# Altium PCB mainPCB.PcbDoc
Units mm, origin at the board's own origin, x right, y up, seen from the top; angles counter-clockwise.
Board outline 65 x 32.8 mm, 2 copper layers (Top Layer, Bottom Layer); 68 components, 58 nets, 349 pads, 175 vias.
Unrouted connection lines stored in the file: 1.
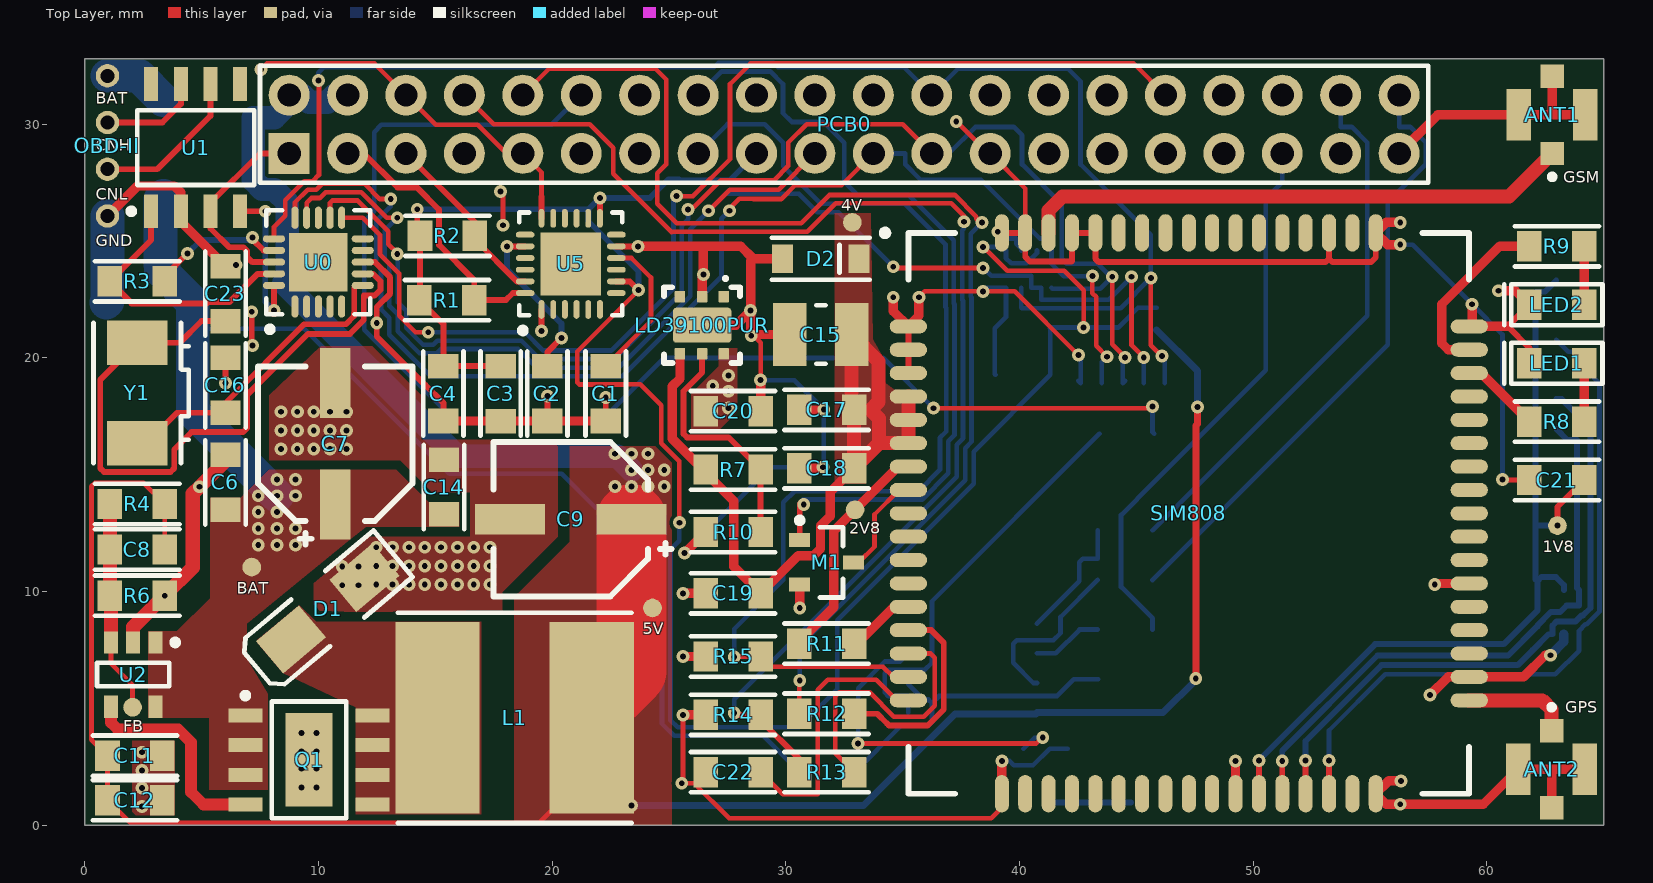
[diagram p0: Top Layer view]
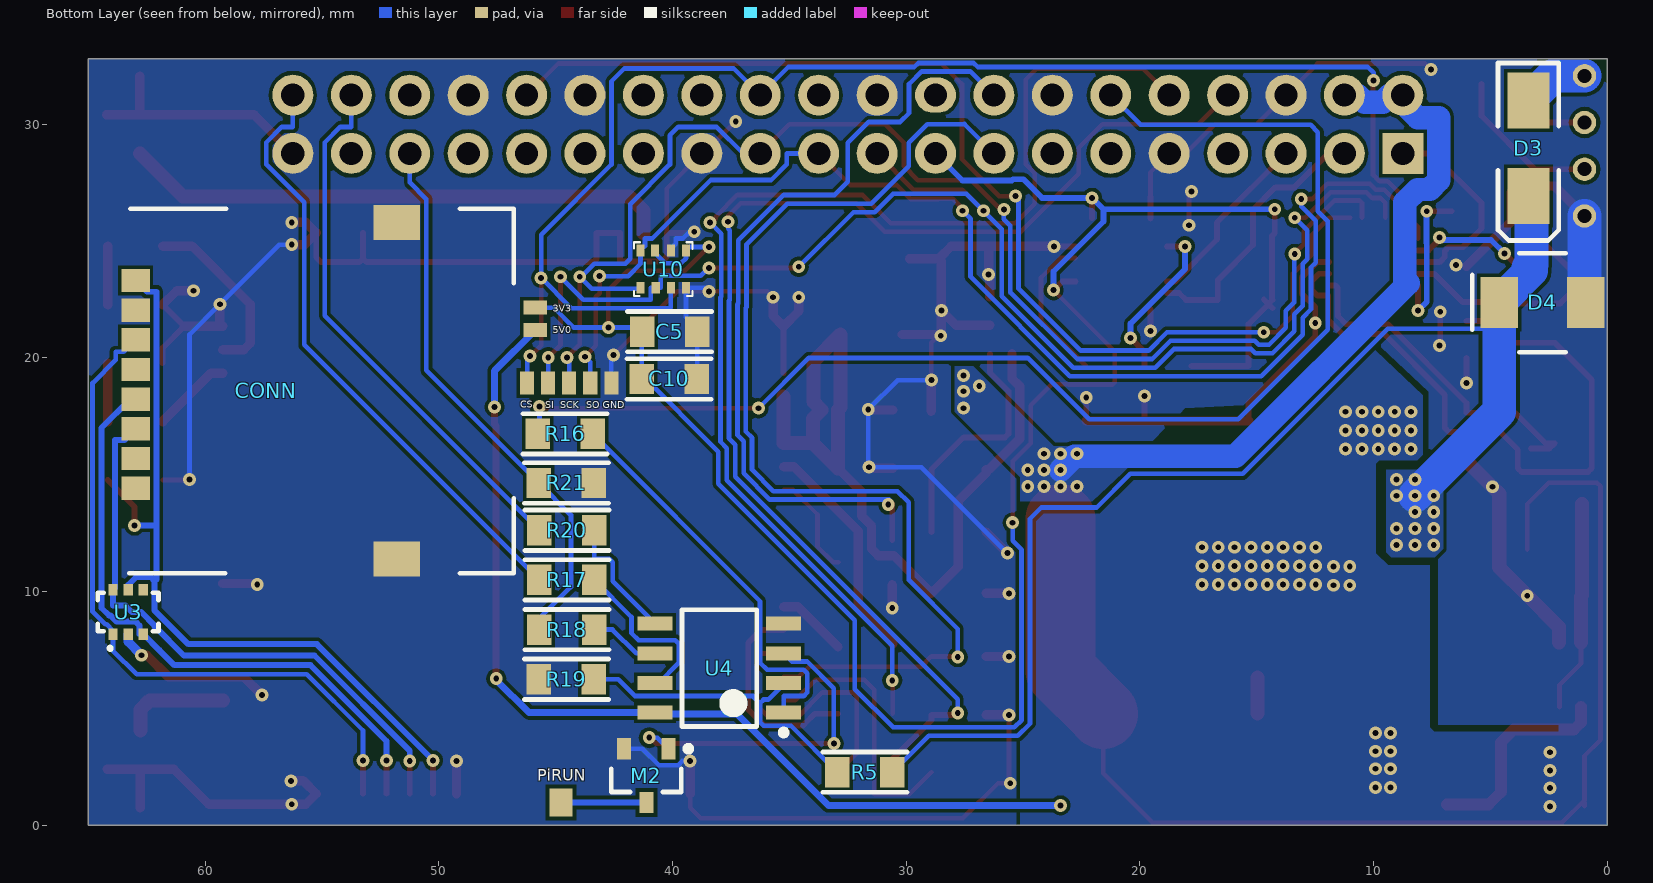
[diagram p1: Bottom Layer view, seen from below]

## Layer stack, top to bottom
Top Solder: solder mask 0.0102, Solder Resist, Dk 3.5
Top Layer: signal copper 0.0356
Dielectric 1: dielectric 0.32, FR-4, Dk 4.8
Bottom Layer: signal copper 0.0356
Bottom Solder: solder mask 0.0102, Solder Resist, Dk 3.5

## Board outline
0.125,0 0,0 0,32.8 65,32.8 65,0

## Design rules (kind name [scope] priority, off if disabled: settings)
Clearance [All] p1: gap=0.16
HoleSize [All] p1: absolutevalues=TRUE maxlimit=6.3 minlimit=0.2 maxpercent=80.000 minpercent=20.000
MinimumAnnularRing [All] p1: minimumring=0.15
PolygonConnect [All] p1: connectstyle=Direct reliefconductorwidth=0.254 reliefentries=4 polygonreliefangle="90 Angle" airgapwidth=0.254
RoutingVias [All] p1: holewidth=0.2 width=0.5 viastyle="Through Hole" minholewidth=0.2 minwidth=0.5 maxholewidth=10 maxwidth=10
SolderMaskExpansion [All] p1: expansion=0.102
Width [All] p1: maxlimit=12 minlimit=0.16 preferedwidth=0.2
29 further rules are at their usual default settings.

## Classes and differential pairs
component class SIM808: ANT1 ANT2 C15 C17 C18 C19 C20 C21 C22 CONN D2 LD39100PUR LED1 LED2 M1 R7 R8 R9 R10 R11 R12 R13 R14 R15 SIM808 U3
component class PowerCircuit: C6 C7 C8 C9 C11 C12 C14 D1 L1 Q1 R4 R6 U2
component class MPU6050: C1 C2 C3 C4 R1 R2 U5
component class CanNode: C16 C23 D3 D4 OBD-II PCB0 R3 U0 U1 Y1
component class ATtiny: M2 R5 R16 R17 R18 R19 R20 R21 U4
component class bmp280_i2c: C5 C10 U10

## Components (designator, comment, footprint, x,y, rotation, side; value= is the part's Value field where it differs from the comment)
ANT1 "antenna" uFL 60.8,29.25 r0 top
ANT2 "antenna" uFL 64.775,3.55 r180 top
C1 "Generic Capacitor" 0805 22.275,18.475 r90 top
C2 "Generic Capacitor" 0805 19.775,18.475 r90 top
C3 "Generic Capacitor" 0805 17.825,18.475 r270 top
C4 "Generic Capacitor" 0805 15.325,18.475 r90 top
C5 "Generic Capacitor" 0805 40.125,21.15 r180 bottom
C6 "Generic Capacitor" 0805 6.05,14.675 r270 top
C7 "47uF, 25V" "Cap 6.3mm dia 5.4mm Height" 10.725,16.325 r180 top
C8 "Generic Capacitor" 0805 2.25,11.775 r180 top
C9 "33uF, 16V" "Cap 6.3mm dia 5.4mm Height" 20.8,13.1 r270 top
C10 "Generic Capacitor" 0805 40.15,19.125 r180 bottom
C11 "Generic Capacitor" 0805 2.15,3 r0 top
C12 "Generic Capacitor" 0805 2.15,1.1 r0 top
C14 "Generic Capacitor" 0805 15.35,14.475 r90 top
C15 "Cap Cer 100uF" "Cap 1210" 31.5,21 r180 top
C16 "Generic Capacitor" 0805 6,18.825 r90 top
C17 "Generic Capacitor" 0805 31.75,17.75 r180 top
C18 "Generic Capacitor" 0805 31.75,15.25 r180 top
C19 "Generic Capacitor" 0805 27.75,9.95 r0 top
C20 "Generic Capacitor" 0805 27.75,17.75 r0 top
C21 "Generic Capacitor" 0805 63,14.75 r180 top
C22 "Generic Capacitor" 0805 27.75,2.25 r180 top
C23 "Generic Capacitor" 0805 6,22.75 r90 top
CONN "CONN SMART CARD" "CONN SMART CARD" 55.1,18.59 r270 bottom
D1 "RSX301L-30TE25" SMA_diode 10.4,9.275 r220 top
D2 "Diode Zener" "Diode Zener" 31.5,24.25 r0 top
D3 "RSX301L-30TE25" SMA_diode 3.375,28.975 r270 bottom
D4 "TVS Diode" "TVS Diode 15" 2.775,22.375 r0 bottom
L1 "15uH" SRN8040 18.4,4.6 r0 top
LD39100PUR "LD39100PUR" LD39100PUR 26.425,21.4 r180 top
LED1 "Led Red" "0805 LED" 63,19.75 r180 top
LED2 "Led Green" "0805 LED" 63,22.25 r180 top
M1 "N-CH Mosfet Switch" SOT32-3 31.75,11.25 r0 top
M2 "N-CH Mosfet Switch" SOT32-3 41.125,2.125 r270 bottom
OBD-II "OBD-II" OBD_II 0.975,29.075 r0 top
PCB0 "Rasberry Pi footprint" "Rasberry PI" 32.5,30 r0 top
Q1 "DMP3037LSS" SOIC-8-PP 9.6,2.795 r0 top
R1 "Resistor" 0805 15.5,22.45 r180 top
R2 "Resistor" 0805 15.525,25.2 r180 top
R3 "Resistor" 0805 2.25,23.25 r180 top
R4 "Resistor" 0805 2.25,13.775 r0 top
R5 "Resistor" 0805 31.775,2.3 r180 bottom
R6 "Resistor" 0805 2.25,9.8 r180 top
R7 "Resistor" 0805 27.75,15.25 r0 top
R8 "Resistor" 0805 63,17.25 r180 top
R9 "Resistor" 0805 63,24.75 r180 top
R10 "Resistor" 0805 27.75,12.575 r0 top
R11 "Resistor" 0805 31.75,7.75 r180 top
R12 "Resistor" 0805 31.75,4.75 r180 top
R13 "Resistor" 0805 31.75,2.25 r180 top
R14 "Resistor" 0805 27.75,4.75 r0 top
R15 "Resistor" 0805 27.75,7.25 r0 top
R16 "Resistor" 0805 44.6,16.775 r180 bottom
R17 "Resistor" 0805 44.525,10.525 r180 bottom
R18 "Resistor" 0805 44.525,8.4 r180 bottom
R19 "Resistor" 0805 44.55,6.275 r180 bottom
R20 "Resistor" 0805 44.525,12.65 r180 bottom
R21 "Resistor" 0805 44.55,14.675 r180 bottom
SIM808 "SIM808" SIM808 47.25,13.35 r0 top
U0 "MCP2515" MCP2515 10,24.1 r90 top
U1 "TCAN332" SOIC-8 4.75,29 r90 top
U2 "IXD3221" SOT23-5 2.075,6.45 r270 top
U3 "TVS Diode" SMF05CT2G 63.3,9.125 r90 bottom
U4 "ATtiny13A" ATtiny13A 38,6.725 r0 bottom
U5 "MPU6050" MPU-6050 20.8,24.025 r90 top
U10 "BMP280" bmp280_i2c 41.65,24.8 r270 bottom
Y1 "XTAL" XTAL-16.000 2.25,18.5 r270 top

## Footprints (in the part's own frame and the unit in brackets; to place one, negate y for a bottom-side part, rotate by r counter-clockwise, add the part's x,y. Pads: shape width x height; smd on the part's side, far side on the other; paste and mask are expansions set on the pad)
0805 [mm] "0805 SMD"
  rect 1.05x1.3 smd: 1(-1.174,-0.025) 2(1.175,-0.025)
  silkscreen extent -1.8,-0.89 1.8,0.84, body extent -1.45,-0.68 1.47,0.63, height 0.64
"0805 LED" [mm] "0805 SMD LED"
  rect 1.05x1.3 smd: 1(1.175,-0.025) 2(-1.174,-0.025)
  silkscreen extent -1.95,-0.9 2.25,0.85, body extent -1.45,-0.68 1.47,0.63, height 0.64
ATtiny13A [mm]
  rect 1.5x0.6 smd: 1(-2.75,1.905) 2(-2.75,0.635) 3(-2.75,-0.635) 4(-2.75,-1.905) 5(2.75,-1.905) 6(2.75,-0.635) 7(2.75,0.635) 8(2.75,1.905)
  silkscreen extent -2.87,-2.5 1.6,2.88, body extent -3.02,-2.5 3.02,2.5, height 1.75
bmp280_i2c [mm] "pressure sensor"
  rect 0.5x0.35 smd: CSB(1.8,1.575) GND(0.2,1.575) GND(1.8,2.225) SCK(1.8,0.275) SDI(1.8,0.925) SDO(0.2,0.275) VDD(0.2,2.225) VDDIO(0.2,0.9)
  silkscreen extent -0.15,0 2.15,2.5, body extent 0,0 2.01,2.49, height 1
"Cap 6.3mm dia 5.4mm Height" [mm] "Cap 6.3mm dia 5.4mm Height"
  rect 1.3x3 smd: 1(0,2.6) 2(0,-2.6)
  silkscreen extent -3.3,-3.3 3.3,4.32, body extent -3.15,-3.15 3.15,3.15, height 5.3
"Cap 1210" [mm] "1210 (3225m)"
  rect 1.45x2.7 smd: 1(-1.325,0) 2(1.325,0)
  silkscreen extent -0.2,-1.25 0.2,1.25, body extent -1.7,-1.35 1.7,1.35, height 2.5
"CONN SMART CARD" [mm] "Micro Sim connector"
  rect 1x1.2 smd: 1(-4.725,-7.875) 2(-2.185,-7.875) 3(0.355,-7.875) 4(2.895,-7.875) 5(-3.455,-7.875) 6(-0.915,-7.875) 7(1.625,-7.875) 8(4.165,-7.875)
  rect 1.5x2 smd: *(-7.2,3.3) *(7.2,3.3)
  silkscreen extent -7.8,-8.15 7.8,8.3, body extent -7.7,-8.15 7.7,8.15, height 1.9
"Diode Zener" [mm]
  rect 0.91x1.22 smd: 1(1.637,0) 2(-1.637,0)
  silkscreen extent -2.1,-0.9 2.1,0.9, body extent -2,-0.8 2,0.8, height 1.2
LD39100PUR [mm]
  rrect20% 0.45x0.5 smd: 1(-0.925,-1.225) 2(0,-1.225) 3(0.95,-1.225) 4(0.95,1.225) 5(0,1.225) 6(-0.925,1.225)
  rrect20% 2.5x1.5 smd: 2(0,0)
  silkscreen extent -1.63,-2.02 1.63,1.62, body extent -1.5,-1.5 1.5,1.5, height 1
MCP2515 [mm] "IC CAN CTLR W/SPI 2.0B 20-QFN"
  oval 0.95x0.3 smd: 1(-1.9,1) 2(-1.9,0.5) 3(-1.9,0) 4(-1.9,-0.5) 5(-1.9,-1) 11(1.9,-1) 12(1.9,-0.5) 13(1.9,0) 14(1.9,0.5) 15(1.9,1)
  oval 0.3x0.95 smd: 6(-1,-1.9) 7(-0.5,-1.9) 8(0,-1.9) 9(0.5,-1.9) 10(1,-1.9) 16(1,1.9) 17(0.5,1.9) 18(0,1.9) 19(-0.5,1.9) 20(-1,1.9)
  rect 2.5x2.5 smd: 21(0,0)
  silkscreen extent -3,-2.23 2.23,2.22, body extent -2.12,-2.12 2.13,2.13, height 1
MPU-6050 [mm]
  oval 0.8x0.25 smd: 1(-1.95,1.25) 2(-1.95,0.75) 3(-1.95,0.25) 4(-1.95,-0.25) 5(-1.95,-0.75) 6(-1.95,-1.25) 13(1.95,-1.25) 14(1.95,-0.75) 15(1.95,-0.25) 16(1.95,0.25) 17(1.95,0.75) 18(1.95,1.25)
  oval 0.25x0.8 smd: 7(-1.25,-1.95) 8(-0.75,-1.95) 9(-0.25,-1.95) 10(0.25,-1.95) 11(0.75,-1.95) 12(1.25,-1.95) 19(1.25,1.95) 20(0.75,1.95) 21(0.25,1.95) 22(-0.25,1.95) 23(-0.75,1.95) 24(-1.25,1.95)
  rect 2.7x2.6 smd: 25(0,0)
  silkscreen extent -2.97,-2.2 2.2,2.2, body extent -2.05,-2.05 2.05,2.05, height 0.95
OBD_II [mm]
  round 1 hole 0.6: 1(0,3) 2(0,1) 3(0,-1) 4(0,-3)
"Rasberry PI" [mm] "Rasberry PI footprint"
  rect 1.75x1.75 hole 1: 1(-23.75,-1.25)
  round 1.75 hole 1: 2(-23.75,1.25) 3(-21.25,-1.25) 4(-21.25,1.25) 5(-18.75,-1.25) 6(-18.75,1.25) 7(-16.25,-1.25) 8(-16.25,1.25) 9(-13.75,-1.25) 10(-13.75,1.25) 11(-11.25,-1.25) 12(-11.25,1.25) 13(-8.75,-1.25) 14(-8.75,1.25) 15(-6.25,-1.25) 16(-6.25,1.25) 17(-3.75,-1.25) 19(-1.25,-1.25) 20(-1.25,1.25) 21(1.25,-1.25) 22(1.25,1.25) 23(3.75,-1.25) 24(3.75,1.25) 25(6.25,-1.25) 26(6.25,1.25) 27(8.75,-1.25) 28(8.75,1.25) 29(11.25,-1.25) 30(11.25,1.25) 31(13.75,-1.25) 32(13.75,1.25) 33(16.25,-1.25) 34(16.25,1.25) 35(18.75,-1.25) 36(18.75,1.25) 37(21.25,-1.25) 38(21.25,1.25) 39(23.75,-1.25) 40(23.75,1.25)
  oval 1.75x1.5 hole 1: 18(-3.75,1.25)
  silkscreen extent -25,-2.5 25,2.5
SIM808 [mm]
  oval 1.6x0.6 smd: 1(-12,8) 2(-12,7) 3(-12,6) 4(-12,5) 5(-12,4) 6(-12,3) 7(-12,2) 8(-12,1) 9(-12,0) 10(-12,-1) 11(-12,-2) 12(-12,-3) 13(-12,-4) 14(-12,-5) 15(-12,-6) 16(-12,-7) 17(-12,-8) 35(12,-8) 36(12,-7) 37(12,-6) 38(12,-5) 39(12,-4) 40(12,-3) 41(12,-2) 42(12,-1) 43(12,0) 44(12,1) 45(12,2) 46(12,3) 47(12,4) 48(12,5) 49(12,6) 50(12,7) 51(12,8)
  oval 0.6x1.6 smd: 18(-8,-12) 19(-7,-12) 20(-6,-12) 21(-5,-12) 22(-4,-12) 23(-3,-12) 24(-2,-12) 25(-1,-12) 26(0,-12) 27(1,-12) 28(2,-12) 29(3,-12) 30(4,-12) 31(5,-12) 32(6,-12) 33(7,-12) 34(8,-12) 52(8,12) 53(7,12) 54(6,12) 55(5,12) 56(4,12) 57(3,12) 58(2,12) 59(1,12) 60(0,12) 61(-1,12) 62(-2,12) 63(-3,12) 64(-4,12) 65(-5,12) 66(-6,12) 67(-7,12) 68(-8,12)
  silkscreen extent -13.14,-12 12,12.14
SMA_diode [mm] "DO-214-AC/SMA; 2 C-Bend Leads; Body 5 x 2.7 mm, inc. leads (LxW)"
  rect 2.4x1.8 smd: 1(-2.05,0) 2(2.05,0)
  silkscreen extent -3.65,-1.3 3.95,1.3
SMF05CT2G [mm] "SOT-363"
  rect 0.5x0.4 smd: 1(-0.95,0.65) 2(-0.95,0) 3(-0.95,-0.65) 4(0.95,-0.65) 5(0.95,0) 6(0.95,0.65)
  silkscreen extent -1.57,-1.3 0.83,1.3, body extent -0.72,-1.2 0.72,1.2, height 1.1
SOIC-8 [mm] "DMP3037LSS"
  rect 1.45x0.6 smd: 1(-2.725,1.905) 2(-2.725,0.635) 3(-2.725,-0.635) 4(-2.725,-1.905) 5(2.725,-1.905) 6(2.725,-0.635) 7(2.725,0.635) 8(2.725,1.905)
  silkscreen extent -2.85,-2.5 1.6,2.88, body extent -3,-2.5 3,2.5, height 1.75
SOIC-8-PP [mm] "DMP3037LSS"
  rect 1.45x0.6 smd: 1(-2.725,1.905) 2(-2.725,0.635) 3(-2.725,-0.635) 4(-2.725,-1.905) 5(2.725,-1.905) 6(2.725,-0.635) 7(2.725,0.635) 8(2.725,1.905)
  rect 2x4 smd: 9(0,0)
  silkscreen extent -2.85,-2.5 1.6,2.88, body extent -3,-2.5 3,2.5, height 1.75
SOT23-5 [mm] "SOT23, 5-Leads, Body 2.90x2.80mm, Pitch 0.95mm, IPC Medium Density"
  rect 0.95x0.6 smd: 1(-1.375,0.95) 2(-1.375,0) 3(-1.375,-0.95) 4(1.375,-0.95) 5(1.375,0.95)
  silkscreen extent -1.5,-1.55 0.5,1.93, body extent -0.9,-1.55 0.9,1.55, height 1.1
SOT32-3 [mm] "SOT23, 3-Leads, Body 2.90x2.30mm, Pitch 0.95mm, IPC Medium Density"
  rect 0.9x0.6 smd: 1(-1.15,0.95) 2(-1.15,-0.95) 3(1.15,0)
  silkscreen extent -1.27,-1.5 0.7,1.92, body extent -0.7,-1.5 0.7,1.5, height 1.1
SRN8040 [mm] "SRN8040 inductor series Bourns"
  rect 3.6x8.2 smd: 1(-3.3,0) 2(3.3,0)
  silkscreen extent -5,-4.5 5,4.5, body extent -4,-4 4,4, height 4
"TVS Diode 15" [mm]
  rect 1.6x2.18 smd: 1(-1.85,0) 2(1.85,0)
  silkscreen extent -1,-2.1 3,2.13, body extent -2.3,-1.97 2.3,1.97, height 2.4
uFL [mm]
  rect 1.05x2.2 smd: 0(0.575,1.15) 0(3.425,1.15)
  rect 1x1 smd: 0(2,2.8) 1(2,-0.5)
  silkscreen extent 1.9,-1.6 2.1,-1.4, body extent 0.7,-0.15 3.3,2.45, height 0.36
XTAL-16.000 [mm]
  rect 1.9x2.6 smd: 0(-2.15,0) 1(2.15,0)
  silkscreen extent -3,-1.87 3,2.2, body extent -3,-1.75 3,1.75, height 1.4

## Part data
ANT1 ANT2: "uFL SMT Antenna Connector"
C1 C2 C3 C4 C5 C6 C8 C10 C11 C12 C14 C16 C17 C18 C19 C20 C21 C22 C23: library part Capacitor, "Generic capacitor"
C7: library part 865080443007, "Polorised capacitor 47uF, 25V"
C9: library part 865060343003, "Polorised capacitor 33uF, 16V"
C15: library part LMK325ABJ107MM-P, "CAP CER 100UF 10V X5R 1210"
D1 D3: "DIODE SCHOTTKY 30V 3A"
D2: library part MMSZ5231BT1G, "DIODE ZENER 5.1V 500MW SOD123"
D4: library part SMBJ15D-M3/H, "TVS DIODE 15VWM 24VC DO214AA"
L1: library part SRN8040-150MCT, "INDUCTOR 15uH 2.4A 70mOHMS SMD"
LD39100PUR: "Adjustable linear voltage regulator"
LED1: library part LTST-C171EKT, "LED RED CLEAR 0805 SMD"
LED2: library part LTST-C170GKT, "LED GREEN CLEAR 0805 SMD"
M1 M2: library part BSH105,215, "MOSFET N-CH 20V 1.05A SOT23"
PCB0: library part "Rasberry Pi"
Q1: "P-CHANNEL ENHANCEMENT MODE MOSFET"
R1 R2 R3 R4 R5 R6 R7 R8 R9 R10 R11 R12 R13 R14 R15 R16 R17 R18 R19 R20 R21: "Generic Resistor"
SIM808: "SIM808 GSM + GPRS + GPS Cellular Module"
U0: "IC CAN CTLR W/SPI 2.0B 20-QFN"
U1: "IC TXRX CAN 8SOIC"
U2: "IC REG CTRLR BUCK SOT25"
U3: library part SMF05CT2G, "TVS DIODE 5VWM 12.5VC SOT363"
U5: "IMU ACCEL/GYRO 3-AXIS I2C 24QFN"
Y1: library part XTAL-16.000, "XTAL16.0000MHZ 18PF SMD"

## Free pads (board coordinates)
  rect 0.6x1 smd far side: 7(43.525,18.925) 8(45.325,18.925) 9(44.425,18.925) 10(46.225,18.925) 12(42.625,18.925)
  rect 1x0.6 smd far side: 11(45.875,22.15) 13(45.875,21.2)
  rect 1x1.2 smd far side: 14(44.775,0.975)
  round 0.8 smd: 15(24.3,9.3) 16(2.05,5.05) 17(32.85,25.8) 19(63.025,12.825) 21(32.967,13.5) 22(7.15,11.05)

## Via types
v1: diameter 0.55, hole 0.25, Top Layer to Bottom Layer, 175 vias

## Nets (pads, with @x,y where several pads share a name; then routed paths per layer and width w, separated by ;. In a path a pad name is that pad's centre, name@x,y a point inside that pad or via, vN(x,y) a via of type N, cw(c..) or ccw(c..) an arc to the next point about the centre after c; other vN are vias at no path point)
5V_FB: C8.2 pad.16 R4.1 R6.2 U2.3 | length 9.1
  Top Layer w0.2: U2.3 1.125,6.925 2.05,6 pad.16
  Top Layer w0.6: R4.1 R4.1 C8.2 R6.2 1.125,9.775 U2.3
808_PWR: M1.1 PCB0.16 | length 34.8
  Top Layer w0.25: M1.1 30.6,13.75 30.625,13.725 v1(30.775,13.725)
  Bottom Layer w0.2: PCB0.16 27.26,32.26 29.345,32.26 29.885,31.72 29.885,30.471 30.256,30.1 31.6,30.1 32.5,29.2 32.5,27.537 33.062,26.975 35.25,26.975 37.195,25.03 37.195,22.33 37.225,22.3 37.225,16.703 36.96,16.438 36.96,15.06 35.84,13.94 30.74,13.94 30.775,13.905 v1(30.775,13.725)
808_RESET: PCB0.15 R15.2 SIM808.16 | length 46.2
  Top Layer w0.2: v1(27.8,7.2) 27.825,7.225 R15.2 29.36,6.79 34.16,6.79 34.6,6.35 SIM808.16
  Bottom Layer w0.2: PCB0.15 27.511,30.011 29.108,29.997 29.9,29.205 29.9,28.2 31.5,26.6 35.1,26.6 36.835,24.865 36.835,22.181 36.865,22.151 36.865,16.852 36.6,16.587 36.6,15.209 35.691,14.3 30.379,14.3 29.9,13.821 29.9,10.5 27.8,8.4 v1(27.8,7.2)
808_RXD: PCB0.8 R13.2 R14.2 | length 55.1
  Top Layer w0.2: PCB0.8 17.5,30 21.605,30 22.615,28.99 22.615,27.885 25.1,25.4 25.11,25.39 25.12,25.4 30.921,25.4 32.136,26.615 37.082,26.615 37.659,26.039 37.475,25.855 37.505,25.825 v1(37.625,25.825)
  Top Layer w0.25: v1(27.8,4.8) 27.875,4.725 R14.2 28.925,4.5 30.575,2.85 R13.2
  Bottom Layer w0.2: v1(27.8,4.8) 27.8,5.391 37.32,14.911 37.32,16.289 37.59,16.559 37.59,22.444 37.555,22.479 37.555,25.464 37.625,25.534 v1(37.625,25.825)
808_TXD: PCB0.10 R12.2 | length 51.9
  Top Layer w0.2: PCB0.10 19.885,32.385 24.415,32.385 24.885,31.915 24.885,28.28 24.5,27.895 24.5,26.6 25.34,25.76 30.66,25.76 31.875,26.975 37.232,26.975 38.16,26.047 38.16,25.961 38.321,25.8 v1(38.4,25.8) ; R12.2 30.575,6.175 v1(30.6,6.2)
  Bottom Layer w0.2: v1(30.6,6.2) 30.6,7.682 37.68,14.762 37.68,16.14 37.95,16.41 37.95,22.593 37.915,22.628 37.915,25.315 v1(38.4,25.8)
6050_INT: U5.12
6050_SCL: PCB0.5 R2.1 U5.23 | length 7.8
  Top Layer w0.25: PCB0.5 16.699,25.801 R2.1 16.699,25.071 18.495,23.275 U5.23
6050_SDA: PCB0.3 R1.1 U5.24 | length 11.7
  Top Layer w0.25: PCB0.3 11.942,28.75 13.392,27.3 14.207,27.3 15.16,26.347 15.16,24.84 16.674,23.326 R1.1 18.025,22.475 18.325,22.775 U5.24
+1.8V: C21.1 CONN.1 pad.19 SIM808.29 U3.5 | length 35.7
  Top Layer w0.254: SIM808.29 v1(50.25,2.775) ; v1(63.025,12.825) 63.025,13.626 C21.1
  Bottom Layer w0.254: v1(50.25,2.775) 55.225,7.75 60.725,7.75 62.163,9.188 62.163,10.444 ; CONN.1 62.492,22.832 62.088,22.832 62.088,12.85 ; v1(63.025,12.825) 62.113,12.825 62.088,12.85 ; U3.5 63.3,10.281 62.956,10.625 62.344,10.625 62.163,10.444 ; 62.088,12.85 62.088,10.519 62.163,10.444
+2.8V: pad.21 R11.2 SIM808.7 | length 9.8
  Top Layer w0.4: R11.2 30.575,7.85 32.05,9.325 32.05,12.583 pad.21 34.817,15.35 SIM808.7
+3.3V: C3.1 C4.2 C5.1 C10.1 pad.11 PCB0.1 PCB0.17 R1.2 R2.2 U0.18 U1.3 U5.8 U5.13 U10.VDD U10.VDDIO | length 105.7
  Top Layer w0.2: v1(23.7,22.9) 21.075,20.275 21.075,18.95 21.16,18.865 23.058,18.865 23.068,18.875 23.775,18.875 24.678,17.972 24.678,16.358 25.45,15.586 v1(25.45,12.95) ; v1(38.45,24.75) 39.475,23.725 41.925,23.725 42.75,22.9 v1(42.75,21.3)
  Top Layer w0.25: U0.18 7.175,24.1 6.96,24.315 6.96,24.568 6.793,24.735 6.19,24.735 5.385,25.54 U1.3 5.385,26.635 7.5,28.75 PCB0.1 ; v1(14.235,26.365) 14.235,25.34 R2.2 14.35,22.5 R1.2 R1.2@14.5,22.3 ; R1.2@14.325,22.125 R1.2@14.5,22.3 ; R1.2@14.7,22.5 R1.2@14.5,22.3 ; U5.13 v1(22.05,26.85) ; U5.8 23.325,23.275 v1(23.7,22.9) ; R1.2@14.5,22.3 15.35,21.45 C4.2 C3.1 ; C3.1 C3.1
  Bottom Layer w0.2: v1(25.45,12.95) 25.45,12.181 25.066,11.797 25.066,4.503 25.379,4.19 30.565,4.19 32.2,5.825 32.2,8.773 38.04,14.613 38.04,15.991 41.324,19.275 41.324,21.25 41.299,21.275 41.324,21.3 v1(42.75,21.3) 44.225,21.3 45.075,22.15 pad.11 ; v1(38.45,24.75) 39.275,24.75 U10.VDD 39.425,24.275 39.65,24.05 40.318,24.05 40.75,24.482 U10.VDDIO
  Bottom Layer w0.25: v1(14.235,26.365) v1@14.335,26.365 ; v1@14.35,26.35 v1@14.335,26.365 ; v1(23.7,22.9) 23.7,23.7 21.565,25.835 21.565,26.365 ; PCB0.17 27.59,27.59 25.487,27.59 25.432,27.645 24.988,27.645 24.193,26.85 v1(22.05,26.85) 21.565,26.365 ; v1@14.335,26.365 21.565,26.365
+4V: C15.1 C17.1 C18.1 C19.2 D2.1 LD39100PUR.4 pad.17 R7.1 SIM808.4 SIM808.5 SIM808.6 | length 35.4
  Top Layer w0.4: LD39100PUR.4 25.475,19.114 25.138,18.777 25.138,16.548 26.461,15.225 R7.1 26.576,15.074 27.775,13.875 27.775,11.075 C19.2 30.54,11.54 31.199,11.54 31.49,11.831 31.49,12.815 31.9,13.225 31.9,14.251 C18.1
  Top Layer w0.6: SIM808.4 SIM808.5 SIM808.6 33.999,16.35 ; 33.999,16.35 33.999,17.401 33.625,17.775 33.975,18.125 33.975,19.85 C15.1 32.825,17.874 C17.1 C18.1 33.999,16.35
+5V: C8.1 C9.1 C11.1 C12.1 C20.1 L1.2 LD39100PUR.6 pad.13 pad.15 PCB0.2 PCB0.4 R4.2 U4.8 | length 126.1
  Top Layer w0.2: C12.1@0.976,0.824 C12.1@0.976,0.975 ; C8.1 3.425,11.801 R4.2 2.515,14.66 0.443,14.66 0.29,14.507 0.29,3.661 C11.1 C12.1 1.951,0.1 19.45,0.1 21.575,2.225 L1.2@21.575,4.775
  Top Layer w0.3: v1(47.55,6.275) 47.55,17.1 47.625,17.175 v1(47.625,17.9)
  Top Layer w3: L1.2@21.575,4.775 23.4,6.6 C9.1
  Bottom Layer w0.3: v1(23.4,0.85) 33.325,0.85 37.245,4.77 U4.8@40.7,4.77 ; U4.8 46.145,4.82 47.55,6.225 v1(47.55,6.275) ; pad.13 47.625,19.45 v1(47.625,17.9)
  Bottom Layer w1: PCB0.4 10.696,31.25 10.388,30.942 9.613,30.942 9.305,31.25 PCB0.2 8.75,30.92 8.115,30.285 7.215,30.285 7.215,27.602 7.607,27.21 8.116,27.21 8.664,26.662 8.664,23.349 8.514,23.199 15.913,15.8 22.8,15.8 v1(23.4,15.2)
  other v1: 22.7,14.5 23.4,14.5 24.1,14.5 24.8,14.5 24.1,15.2 24.8,15.2 22.7,15.9 23.4,15.9 24.1,15.9 27.55,17.85 27.55,18.575 26.875,18.8 27.55,19.25
+12V: C6.2 C7.1 C14.1 D3.2 D4.2 pad.22 Q1.1 Q1.2 Q1.3 R5.2 U2.1 U2.5 | length 54
  Bottom Layer w0.2: 4.625,21.25 9.388,21.25 15.598,15.04 20.41,15.04 21.85,13.6 24.225,13.6 24.706,13.119 24.706,4.354 25.23,3.83 29.045,3.83 R5.2
  Bottom Layer w1.45: D3.2 3.24,26.79 3.24,23.995 3.375,23.86 3.375,23.845 3.265,23.735 D4.2 4.625,21.25 4.625,17.7 v1(8.225,14.1)
  other v1: 7.425,12 8.225,12 9.025,12 7.425,12.7 8.225,12.7 9.025,12.7 7.425,13.4 8.225,13.4 7.425,14.1 9.025,14.1 8.225,14.8 9.025,14.8
AT_RST: PCB0.12 R16.1 | length 56.7
  Top Layer w0.2: v1(36.325,17.85) 45.625,17.85 v1(45.7,17.925)
  Bottom Layer w0.2: PCB0.12 19.975,29.975 12.7,29.975 12.385,29.66 12.385,26.276 11.965,25.856 11.965,21.21 15.8,17.375 22.175,17.375 24.8,20 34.175,20 v1(36.325,17.85) ; v1(45.7,17.925) 45.7,16.824 R16.1
AT_SCK: PCB0.40 R17.1 | length 26.3
  Bottom Layer w0.2: R17.1 55.765,20.566 55.765,26.66 57.385,28.28 57.385,29.22 56.72,29.885 56.25,29.885 PCB0.40
AT_SI: PCB0.38 R20.1 | length 23.2
  Bottom Layer w0.2: R20.1 54.885,21.811 54.885,29.22 54.22,29.885 53.75,29.885 PCB0.38
AT_SO: PCB0.35 R18.1 R21.1 | length 23.8
  Bottom Layer w0.2: R18.1 45.699,8.851 44.35,10.2 44.35,13.276 R21.1 50.54,19.466 50.54,26.8 51.25,27.51 PCB0.35
BAT_UR: D3.1 OBD-II.1 | length 2.8
  Bottom Layer w1.45: OBD-II.1 2.325,32.075 D3.1
CS: pad.10 PCB0.24 U0.16 U10.CSB | length 63.5
  Top Layer w0.2: U0.16 8.1,25.6 8.59,26.09 8.59,26.753 9.398,27.561 9.755,27.561 10.025,27.831 10.025,31.852 v1(10,31.877) ; v1(45.625,23.425) 45.625,20.55 46.099,20.076 v1(46.102,20.076)
  Bottom Layer w0.2: v1(10,31.877) 10,32.2 10.25,32.45 26.941,32.45 27.111,32.62 29.494,32.62 29.664,32.45 35.05,32.45 PCB0.24 37.385,32.385 42.065,32.385 42.615,31.835 42.615,28.28 45.625,25.27 v1(45.625,23.425) 44.33,22.13 40.095,22.13 40.075,22.15 U10.CSB ; v1(46.102,20.076) 46.225,19.953 pad.10
GND: ANT1.0 ANT2.0 C1.1 C2.1 C3.2 C4.1 C5.2 C6.1 C7.2 C9.2 C10.2 C11.2 C12.2 C14.2 C15.2 C16.2 C17.2 C18.2 C19.1 C20.2 C21.2 C22.2 C23.2 CONN.5 CONN.* D1.1 D2.2 D4.1 LD39100PUR.2 LED1.1 LED2.1 M1.2 M2.2 OBD-II.4 pad.12 PCB0.6 PCB0.9 PCB0.14 PCB0.20 PCB0.25 PCB0.30 PCB0.34 PCB0.39 Q1.9 R6.1 R10.1 R14.1 R15.1 R19.1 R21.2 SIM808.1 SIM808.2 SIM808.3 SIM808.18 SIM808.28 SIM808.34 SIM808.36 SIM808.40 SIM808.51 SIM808.52 SIM808.54 SIM808.64 SIM808.65 SIM808.67 SIM808.68 U0.8 U1.2 U2.2 U3.2 U4.4 U5.1 U5.11 U5.18 U10.GND | length 228.4
  Top Layer w0.2: v1(7.55,32.35) 7.8,32.6 12.4,32.6 PCB0.6 15.025,29.975 16.825,29.975 18.05,28.75 PCB0.9 19.55,27.95 19.55,26.9 ; v1@17.8,25.775 v1(17.9,25.675) 17.9,27.025 v1(17.8,27.125) ; v1(25.601,4.725) 25.601,1.851 v1(25.55,1.8) 26.075,1.8 27.575,0.3 38.8,0.3 39.25,0.75 SIM808.18 ; v1(25.601,9.925) v1@25.675,9.999 ; v1@28.5,21.075 28.575,21 28.925,20.65 v1(28.925,19.05) ; 28.5,24.15 28.6,24.25 ; v1@34.59,22.61 v1(34.6,22.6) ; v1(35.7,22.6) 35.95,22.85 v1(38.45,22.85) 39.8,22.85 v1(42.525,20.125) ; v1(37.3,30.125) 38.675,28.75 PCB0.25 40.25,27.25 SIM808.67 ; v1(60.675,14.8) 60.7,14.775 C21.2 ; 62.775,2.375 62.8,2.4
  Top Layer w0.25: v1(6.025,18.926) C16.2 ; C2.1 v1(19.8,18.375) ; C1.1 v1(22.3,18.3) ; LED1.1 61.825,20.425 60.9,21.35 LED2.1
  Top Layer w0.254: v1(7.15,21.975) 7.15,20.55 v1(7.175,20.525) ; U0.8 12.423,24.1 13.072,23.451 13.072,22.749 12.5,22.177 v1(12.5,21.5) 12.5,20.919 14.581,18.838 14.587,18.838 15.35,18.075 C4.1 ; v1(19.55,21.15) U5.1 ; U5.18 19.55,26.9 ; U5.11 v1(23.675,24.775) ; SIM808.3 SIM808.2 SIM808.1 ; SIM808.68 SIM808.67 40.25,24.325 40.45,24.125 42.225,24.125 42.25,24.15 SIM808.65 SIM808.64 43.25,24.25 43.4,24.1 53.1,24.1 53.25,24.25 ; SIM808.54 53.25,24.25 ; SIM808.52 55.25,24.3 55.05,24.1 53.4,24.1 53.25,24.25
  Top Layer w0.4: OBD-II.4 2.26,27.36 3.84,27.36 4.115,27.085 U1.2 4.115,25.835 C23.2 ; C4.1 C3.2 C3.2 19.799,17.3 C2.1 C1.1 ; v1(23.675,24.775) 28.075,24.775 28.6,24.25 D2.2 ; v1(25.601,4.725) R14.1 R14.1 ; v1(25.601,7.225) R15.1 ; v1(25.601,9.925) C19.1 ; v1(25.675,11.649) R10.1 ; LD39100PUR.2@26.425,21.4 27.875,21.4 v1(28.5,22.025) ; LD39100PUR.2@26.425,22.625 26.425,23.55 26.45,23.575 v1(26.475,23.575) 26.475,24.7 26.425,24.75 ; v1@28.5,21.075 v1(28.5,22.025) ; 28.5,24.15 v1(28.5,22.025) ; v1@28.575,21 C15.2 ; C20.2 v1(28.925,19.05) ; C18.2 31.55,15.275 v1(31.6,15.325) ; C17.2 31.6,17.775 v1(31.625,17.8) ; v1(30.6,9.3) M1.2 ; v1(34.6,22.6) 34.6,22 SIM808.1 35.7,21.8 v1(35.7,22.6) ; SIM808.18 v1(39.25,2.75) ; SIM808.28 v1(49.25,2.75) ; PCB0.39 57.9,30.4 61.375,30.4 62.8,30.4 ; v1(56.3,24.85) 55.75,24.85 SIM808.52 55.7,25.8 v1(56.3,25.8) ; v1(56.325,1.9) 55.8,1.9 SIM808.34 55.7,0.9 v1(56.3,0.9) 59.85,0.9 61.35,2.4 62.8,2.4 ANT2.0@64.2,2.4 ; v1(57.575,5.575) 58.35,6.35 61.575,6.35 62.5,7.275 v1(62.725,7.275) ; v1(57.775,10.3) 57.825,10.35 SIM808.40 ; v1(59.375,22.3) 59.375,21.475 SIM808.51 60.9,21.35 ; v1(60.5,22.875) 61.225,22.875 LED2.1 ; ANT2.0@62.775,0.75 62.775,2.375 ; ANT1.0@62.8,32.05 62.8,30.4 ; ANT1.0@64.225,30.4 62.8,30.4
  Top Layer w0.6: U2.2 2.075,8.476 v1(3.424,9.825) 4.625,11.026 4.625,14.195 v1(4.915,14.485) 6.025,15.595 C6.1
  Bottom Layer w0.2: v1(25.675,11.649) 29.351,15.325 v1(31.6,15.325) 31.625,15.35 v1(31.625,17.8) 30.375,19.05 v1(28.925,19.05) ; v1(38.45,22.85) 38.6,23 39.425,23 39.425,21.75 38.95,21.275 C5.2 38.95,19.3 C10.2@38.975,19.275 ; v1(39.25,2.75) 39.582,2.75 39.767,2.565 40.583,2.565 41.293,3.275 M2.2 ; v1@39.275,25.4 39.565,25.11 39.86,25.11 39.86,24.889 40.075,24.674 U10.GND@40.075,24.6 ; pad.12@42.525,19.025 pad.12 42.625,20.025 v1(42.525,20.125) ; v1(56.3,24.85) 56.825,24.85 v1(59.375,22.3) 60.675,21 v1(60.675,14.8)
  Bottom Layer w0.4: v1(62.725,7.275) 63.3,7.85 U3.2
  Bottom Layer w1.45: D4.1 0.975,22.425 OBD-II.4
  other v1: 2.45,0.8 2.45,1.6 9.275,1.62 9.925,1.62 2.45,2.35 9.275,2.42 9.925,2.42 2.45,3.125 9.275,3.17 9.925,3.17 9.275,3.945 9.925,3.945 11.025,10.275 11.725,10.275 12.475,10.3 13.175,10.3 13.875,10.3 14.55,10.3 15.25,10.3 15.95,10.3 16.65,10.3 17.35,10.3 11.025,11.075 11.725,11.075 12.475,11.1 13.175,11.1 13.875,11.1 14.55,11.1 15.25,11.1 15.95,11.1 16.65,11.1 17.35,11.1 12.475,11.9 13.175,11.9 13.875,11.9 14.55,11.9 15.25,11.9 15.95,11.9 16.65,11.9 17.35,11.9 8.4,16.1 9.1,16.1 9.8,16.1 10.5,16.1 11.2,16.1 8.4,16.9 9.1,16.9 9.8,16.9 10.5,16.9 11.2,16.9 8.4,17.7 9.1,17.7 9.8,17.7 10.5,17.7 11.2,17.7 28.525,20.95 6.475,23.975 39.075,25.4
GPS_RF: ANT2.1 SIM808.35 | length 4.6
  Top Layer w0.6: SIM808.35 62.375,5.35 62.775,4.95 ANT2.1
GSM_RF: ANT1.1 SIM808.66 | length 23.5
  Top Layer w0.6: SIM808.66 41.25,26.3 41.85,26.9 60.95,26.9 ANT1.1
MCP_INT: PCB0.32 U0.11 | length 49
  Top Layer w0.2: U0.11 11.905,26 12.635,25.27 12.635,24.435 13.459,23.611 13.459,21.798 14.157,21.1 v1(14.7,21.1) ; v1(25.325,26.925) 26.03,26.925 27.615,28.51 27.615,31.72 28.495,32.6 44.9,32.6 PCB0.32
  Bottom Layer w0.2: v1(14.7,21.1) 18.843,21.1 19.628,20.315 22.54,20.315 25.195,22.97 25.195,26.795 v1(25.325,26.925) v1@25.325,26.955
NetC1_2: C1.2 U5.10 | length 6.4
  Top Layer w0.2: C1.2 24.235,21.585 24.235,23.44 23.4,24.275 U5.10
NetC2_2: C2.2 U5.20 | length 7.1
  Top Layer w0.254: v1(18.075,24.775) U5.20 ; C2.2 19.8,20.25 v1(20.4,20.85)
  Bottom Layer w0.254: v1(18.075,24.775) 18.075,23.8 20.4,21.475 v1(20.4,20.85)
NetC16_1: C16.1 U0.6 Y1.1 | length 14.5
  Top Layer w0.25: Y1.1@3.275,16.125 2.475,16.125 Y1.1 2.65,16.35 3.951,17.651 C16.1 6.025,18.075 9.39,21.44 11.18,21.44 11.53,21.79 11.53,21.902 11.535,21.907 11.535,23.01 11.625,23.1 U0.6
NetC22_1: C22.1 SIM808.17 | length 11.7
  Top Layer w0.2: C22.1 29.874,1.325 31.375,1.325 31.375,5.8 31.8,6.225 33.875,6.225 34.75,5.35 SIM808.17
NetC23_1: C23.1 U0.7 Y1.0 | length 28.6
  Top Layer w0.25: C23.1 5,21.576 4.074,20.65 Y1.0 0.665,19.065 0.665,15.282 0.832,15.115 3.668,15.115 3.835,15.282 3.835,16.085 4.575,16.825 6.777,16.825 6.96,17.008 6.96,18.43 9.56,21.03 11.35,21.03 11.94,21.62 11.94,21.732 11.945,21.737 11.945,22.665 12.405,22.665 12.66,22.92 12.66,23.28 12.34,23.6 U0.7
NetD1_2: D1.2 L1.1 Q1.5 Q1.6 Q1.7 Q1.8 | length 1.5
  Top Layer w0.6: L1.1@14.975,4.775 L1.1@14.975,6.325
NetLD39100PUR_5: LD39100PUR.5 R7.2 R10.2 | length 10.4
  Top Layer w0.254: LD39100PUR.5 26.425,19.375 25.625,18.575 25.625,16.75 25.775,16.6 27.55,16.6 R7.2 R10.2
NetLED1_2: LED1.2 R8.1 | length 2.5
  Top Layer w0.4: R8.1 LED1.2
NetLED2_2: LED2.2 R9.1 | length 2.5
  Top Layer w0.4: LED2.2 R9.1
NetM1_3: M1.3 SIM808.8 | length 4.4
  Top Layer w0.2: M1.3 33.125,11.25 33.8,11.925 33.8,13.3 34.85,14.35 SIM808.8
NetM2_1: M2.1 U4.3 | length 14.2
  Top Layer w0.2: v1(33.1,3.5) 40.725,3.5 40.975,3.75 v1(41,3.75)
  Bottom Layer w0.2: v1(33.1,3.5) 33.1,5.867 34.243,7.01 34.9,7.01 U4.3 ; M2.1 40.65,3.75 v1(41,3.75)
NetOBD-II_2: OBD-II.2 U1.7 | length 4.3
  Top Layer w0.254: OBD-II.2 3.325,30.075 4.115,30.865 U1.7
NetOBD-II_3: OBD-II.3 U1.6 | length 6.7
  Top Layer w0.254: OBD-II.3 3.1,28.075 5.385,30.36 U1.6
NetQ1_4: Q1.4 U2.4 | length 9.1
  Top Layer w0.5: U2.4 1.125,4.4 1.425,4.1 4,4.1 4.55,3.55 4.55,1.425 5.085,0.89 Q1.4
NetR3_1: R3.1 U0.17 | length 5.9
  Top Layer w0.254: R3.1 3.424,23.499 v1(4.4,24.475) ; v1(7.175,25.151) 7.175,25.132 7.15,25.107 7.657,24.6 U0.17
  Bottom Layer w0.254: v1(4.4,24.475) 4.975,25.05 7.074,25.05 v1(7.175,25.151)
NetR3_2: R3.2 U0.19 U1.1 | length 11.7
  Top Layer w0.254: U1.1 2.845,25.045 R3.2 2.012,22.338 5.206,22.338 5.256,22.388 6.189,22.388 7.401,23.6 U0.19
NetR5_1: R5.1 R19.2 U4.2 | length 13.9
  Bottom Layer w0.2: R5.1 34.934,4.26 36.108,4.26 36.26,4.412 36.26,5.228 ; U4.2 35.25,6.039 35.909,5.38 36.108,5.38 36.26,5.228 ; R19.2 42.328,6.25 41.608,5.53 36.562,5.53 36.26,5.228
NetR8_2: R8.2 SIM808.49 | length 3.4
  Top Layer w0.4: SIM808.49 59.75,19.35 R8.2
NetR9_2: R9.2 SIM808.50 | length 7.7
  Top Layer w0.4: SIM808.50 58.35,20.35 58.075,20.625 58.075,22.3 60.55,24.775 R9.2
NetR11_1: R11.1 SIM808.13 | length 3
  Top Layer w0.4: R11.1@32.924,7.642 34.632,9.35 SIM808.13
NetR12_1: R12.1 SIM808.14 | length 8.9
  Top Layer w0.25: R12.1 33.918,4.775 34.338,4.355 34.342,4.355 34.432,4.265 36.072,4.265 36.76,4.953 36.76,7.815 36.225,8.35 SIM808.14
NetR13_1: R13.1 SIM808.15 | length 11.9
  Top Layer w0.2: R13.1 32.114,3.085 32.114,5.543 32.124,5.533 32.139,5.533 32.291,5.685 33.592,5.685 34.627,4.65 35.913,4.65 36.375,5.112 36.375,7.175 36.2,7.35 SIM808.15
  Top Layer w0.25: SIM808.15 SIM808.15@35.295,7.305
NetR16_2: R16.2 U4.1 | length 17.6
  Bottom Layer w0.2: U4.1 35.25,5.53 34.392,5.53 34.24,5.682 34.24,6.498 34.392,6.65 35.958,6.65 36.26,6.952 36.26,9.585 R16.2
NetR17_2: R17.2 U4.7 | length 7.3
  Bottom Layer w0.2: U4.7 40.602,6.09 39.74,6.952 39.74,7.768 39.892,7.92 41.458,7.92 41.76,8.222 41.76,8.91 R17.2
NetR18_2: R18.2 U4.6 | length 3
  Bottom Layer w0.2: U4.6 41.56,7.36 42.575,8.375 R18.2
NetR20_2: R20.2 U4.5 | length 5.4
  Bottom Layer w0.2: U4.5 42.565,10.445 42.565,11.258 42.717,11.41 43.35,11.41 R20.2
NetU0_20: U0.20 U1.4 | length 6.6
  Top Layer w0.25: U1.4 v1(7.729,26.275) ; v1(8.1,22.026) U0.20
  Bottom Layer w0.25: v1(7.729,26.275) 7.735,26.269 7.735,24.919 7.729,24.913 7.729,22.397 v1(8.1,22.026)
PIRUN: M2.3 pad.14 | length 3.6
  Bottom Layer w0.254: M2.3 pad.14
SCK: pad.9 PCB0.23 U0.12 U10.SCK | length 59.3
  Top Layer w0.2: U0.12 10.5,26.645 10.59,26.735 11.679,26.735 12.995,25.419 12.995,24.873 13.376,24.492 v1(13.376,24.451) ; v1(25.825,26.35) 25.964,26.35 27.214,27.6 29.5,27.6 30.115,28.215 30.115,29.22 30.895,30 35,30 PCB0.23 ; v1(43.975,23.475) 43.975,20.582 44.525,20.032 v1(44.525,20.025)
  Top Layer w0.254: v1(13.376,24.451) 13.381,24.451 v1@13.415,24.485
  Bottom Layer w0.2: v1@13.4,24.45 13.4,22.375 13.755,22.02 13.755,21.288 14.478,20.565 14.922,20.565 15.097,20.74 18.694,20.74 19.479,19.955 22.689,19.955 25.53,22.796 25.555,22.796 25.555,25.664 25.825,25.934 v1(25.825,26.35) ; PCB0.23 36.988,28.75 38.123,29.885 39.765,29.885 40.115,29.535 40.115,28.28 41.81,26.585 41.81,24.242 42.017,24.035 43.347,24.035 43.907,23.475 v1(43.975,23.475) 43.465,22.965 41.41,22.965 U10.SCK ; pad.9@44.525,19.025 pad.9 44.425,19.925 v1(44.525,20.025)
SI: pad.8 PCB0.19 U0.14 U10.SDI | length 60.7
  Top Layer w0.2: U0.14 9.5,26.645 9.696,26.841 10.053,26.841 10.307,27.095 11.828,27.095 12.923,26 13.4,26 13.399,26.001 v1(13.376,26.001) ; v1(26.7,26.3) 27.6,27.2 29.7,27.2 PCB0.19 ; v1(34.6,23.9) 34.65,23.85 v1(38.45,23.85) ; v1(44.8,23.475) 44.8,20.55 v1(45.325,20.025)
  Bottom Layer w0.2: v1(13.376,26.001) 12.841,25.466 12.841,24.23 13.04,24.03 13.04,22.226 13.395,21.871 13.395,21.139 14.329,20.205 15.071,20.205 15.246,20.38 18.545,20.38 19.345,19.58 22.848,19.58 25.915,22.647 25.915,25.515 v1(26.7,26.3) 27.425,27.025 30.566,27.025 31.351,26.24 32.26,26.24 v1(34.6,23.9) ; v1(38.45,23.85) 38.79,23.51 40.51,23.51 40.51,23 U10.SDI 40.94,23 40.94,22.49 43.815,22.49 v1(44.8,23.475) ; pad.8 v1(45.325,20.025)
SIMCLK: CONN.3 SIM808.31 U3.3 | length 26.7
  Top Layer w0.254: SIM808.31 v1(52.25,2.775)
  Bottom Layer w0.254: v1(52.25,2.775) 52.25,3.604 55.496,6.85 61.325,6.85 61.963,7.488 61.963,7.497 62.641,8.175 U3.3 62.813,8.175 62.813,8.544 62.981,8.712 63.787,8.712 64.061,8.986 64.121,8.986 64.437,9.302 64.437,17.009 63.211,18.235 CONN.3
SIMDATA: CONN.7 SIM808.30 U3.6 | length 25.3
  Top Layer w0.254: SIM808.30 v1(51.25,2.75)
  Bottom Layer w0.254: v1(51.25,2.75) 51.25,3.19 55.324,7.264 60.914,7.264 62.163,8.513 62.163,8.544 62.745,9.126 63.142,9.126 63.416,9.4 63.95,9.4 U3.6 63.862,10.163 63.862,16.482 63.458,16.482 CONN.7
SIMRST: CONN.2 SIM808.32 U3.1 | length 29.5
  Top Layer w0.254: SIM808.32 v1(53.25,2.775)
  Bottom Layer w0.2: v1(53.25,2.775) 53.25,4.057 55.656,6.463 62.938,6.463 63.95,7.475 U3.1 63.95,8.328 64.221,8.599 64.282,8.599 64.824,9.141 64.824,18.926 63.835,19.915 63.835,20.265 63.485,20.265 CONN.2
SO: pad.7 PCB0.21 U0.15 U10.SDO | length 55.8
  Top Layer w0.2: U0.15 9,26.654 9.547,27.201 9.904,27.201 10.158,27.455 11.977,27.455 12.632,26.8 v1(13.1,26.8) ; v1(27.6,26.3) 27.6,26.4 28.01,26.81 28.611,26.81 28.621,26.8 29.809,26.8 30.409,27.4 32.4,27.4 PCB0.21 ; v1(43.125,23.5) 43.125,22.775 43.285,22.615 43.285,20.515 v1(43.75,20.05)
  Bottom Layer w0.2: v1(13.1,26.8) 13.1,26.482 12.481,25.863 12.481,24.08 12.68,23.881 12.68,22.077 13.035,21.722 13.035,20.99 14.805,19.22 22.997,19.22 27.25,23.472 27.25,25.95 v1(27.6,26.3) ; PCB0.21 35.115,28.75 35.115,28.28 35.78,27.615 38.36,27.615 40.865,25.11 41.185,25.11 41.185,24.79 U10.SDO 41.375,24.025 41.9,23.5 v1(43.125,23.5) ; pad.7 43.525,19.825 v1(43.75,20.05)
pads on no net: CONN.4 CONN.6 CONN.8 LD39100PUR.1 LD39100PUR.3 PCB0.7 PCB0.11 PCB0.13 PCB0.18 PCB0.22 PCB0.26 PCB0.27 PCB0.28 PCB0.29 PCB0.31 PCB0.33 PCB0.36 PCB0.37 SIM808.9 SIM808.10 SIM808.11 SIM808.12 SIM808.19 SIM808.20 SIM808.21 SIM808.22 SIM808.23 SIM808.24 SIM808.25 SIM808.26 SIM808.27 SIM808.33 SIM808.37 SIM808.38 SIM808.39 SIM808.41 SIM808.42 SIM808.43 SIM808.44 SIM808.45 SIM808.46 SIM808.47 SIM808.48 SIM808.53 SIM808.55 SIM808.56 SIM808.57 SIM808.58 SIM808.59 SIM808.60 SIM808.61 SIM808.62 SIM808.63 U0.1 U0.2 U0.3 U0.4 U0.5 U0.9 U0.10 U0.13 U0.21 U1.5 U1.8 U3.4 U5.2 U5.3 U5.4 U5.5 U5.6 U5.7 U5.9 U5.14 U5.15 U5.16 U5.17 U5.19 U5.21 U5.22 U5.25

## Polygon pours and split planes (outlines as drawn)
+12V on Top Layer "Top Layer-No Net" (solid, pour order 8): 7.825,5.624 7.825,1.525 5.325,1.525 5.325,4.6 2.725,4.6 2.725,5.55 2.725,8.3 3.95,8.3 5.375,9.725 5.375,14.025 6.675,14.025 7.875,15.225 11.375,15.225 13.325,15.225 14.725,13.825 16.025,13.825 16.025,12.775 12.057,12.775 11.375,12.25 6.925,8.628 6.925,7.13
+5V on Top Layer "Top Layer-No Net" (solid, pour order 4): 27.125,20.425 27.925,20.425 27.925,19.375 27.925,17.7 27.2,16.975 25.95,16.975 25.95,18.475 27.125,19.65 27.125,20.425
+4V on Top Layer "Top Layer-No Net" (solid, pour order 2): 35.475,18.6 34.625,18.65 34.2,18.975 34.175,19 34.175,19.925 34.175,20 33.725,20.8 33.647,26.2 32.1,26.2 32.1,14.675 32.1,14.625 33.425,14.625 33.425,15.425 34.125,16.125 35.475,16.125
NetD1_2 on Top Layer "SW NODE" (solid, pour order 14): 11.6,0.475 16.975,0.475 16.975,8.7 10.826,8.7 9.9,8.7 9.175,9.425 7.325,7.875 8.5,6.5 11.6,5.05
+5V on Top Layer "5V" (solid, pour order 16): 18.375,0 18.375,9.5 18.375,9.75 20.75,12.125 20.75,16.225 24.425,16.225 25.125,15.525 25.125,0
GND on Top Layer "gnd" (solid, pour order 20): 16.5,12.35 16.5,14.25 14.875,14.25 13.5,15.625 7.9,15.625 7.9,18.4 10.1,20.5 12.3,20.5 14.4,18.4 14.4,16.5 19.975,16.5 20.25,16.225 20.25,12.35 17.875,9.975 17.875,9.2 11.625,9.125 10.05,9.175 9.8,9.45 9.8,10.353 12.201,12.35
GND on Top Layer "enable" (solid, pour order 34): 3.85,0.425 2.175,0.425 2.025,0.575 2.025,3.625 3.85,3.625
+5V on Bottom Layer "5V" (solid, pour order 18): 27.125,19.65 27.925,19.65 27.925,17.7 27.2,16.975 25.125,14.9 25.125,13.875 22.05,13.875 20.4,15.4 22.4,16.225 23.7,16.225
+12V on Bottom Layer "12V" (solid, pour order 24): 9.45,15.225 9.45,11.675 9.25,11.475 7.375,11.475 7.025,11.825 7.025,15.225
GND on Bottom Layer "PWR_GND" (solid, pour order 28): 25.125,0 0,0 0,4 7.4,4 7.6,4.2 7.6,11.125 9.375,11.125 9.9,11.65 9.9,15.475 9.75,15.625 8.125,15.625 7.9,15.85 7.9,18.4 10.1,20.5 10.275,20.5 10.275,20.475 13.575,17.175 17.875,17.175 21.725,13.325 25.125,13.325
GND on Bottom Layer "GND_PLANE" (solid, pour order 32): 0,3.55 0,32.8 65,32.8 65,0 26.875,0 25.3,0 25.3,13.875 24.4,13.875 22.05,13.875 18.087,17.837 14.7,18.025 13.413,18.9 11.976,19.877 11.31,20.75 9.975,20.75 7.633,18.549 7.633,15.535 7.23,11.85 7.23,4.3 2.075,4.3 2.075,3.55

## Silkscreen, mask and mechanical layers (free items; w line width, h text height)
Top Overlay:
  text "GSM" at 63.275,27.5 h0.5
  text "4V" at 32.375,26.3 h0.5
  text "2V8" at 32.725,12.475 h0.5
  text "1V8" at 62.4,11.675 h0.5
  text "BAT" at 6.5,9.9 h0.5
  text "5V" at 23.875,8.175 h0.5
  text "GPS" at 63.35,4.825 h0.5
  text "FB" at 1.65,4 h0.5
Bottom Overlay:
  text "3V3" at 45.125,21.975 h0.3
  text "5V0" at 45.125,21.05 h0.3
  text "CS" at 46.525,17.875 h0.3
  text "GND" at 43,17.85 h0.3
  text "SO" at 43.7,17.85 h0.3
  text "SCK" at 44.8,17.85 h0.3
  text "SI" at 45.45,17.85 h0.3
  text "PiRUN" at 45.8,1.9 h0.5

## Dimensions
0,0 to 65,0 on Top Layer
0,0 to 0,32.8 on Top Layer

## Text inside footprints (layer, text, board x,y; h text height)
OBD-II: Top Overlay "BAT" at 0.475,30.875 h0.5; Top Overlay "CNL" at 0.475,26.775 h0.5; Top Overlay "CNH" at 0.475,28.875 h0.5; Top Overlay "GND" at 0.475,24.775 h0.5